# Altium PCB rgbController.PcbDoc
Units mil, origin at the board's own origin, x right, y up, seen from the top; angles counter-clockwise.
Board outline 3200 x 2470 mil, 2 copper layers (Top Layer, Bottom Layer); 44 components, 40 nets, 134 pads, 11 vias.
Unrouted connection lines stored in the file: 2.
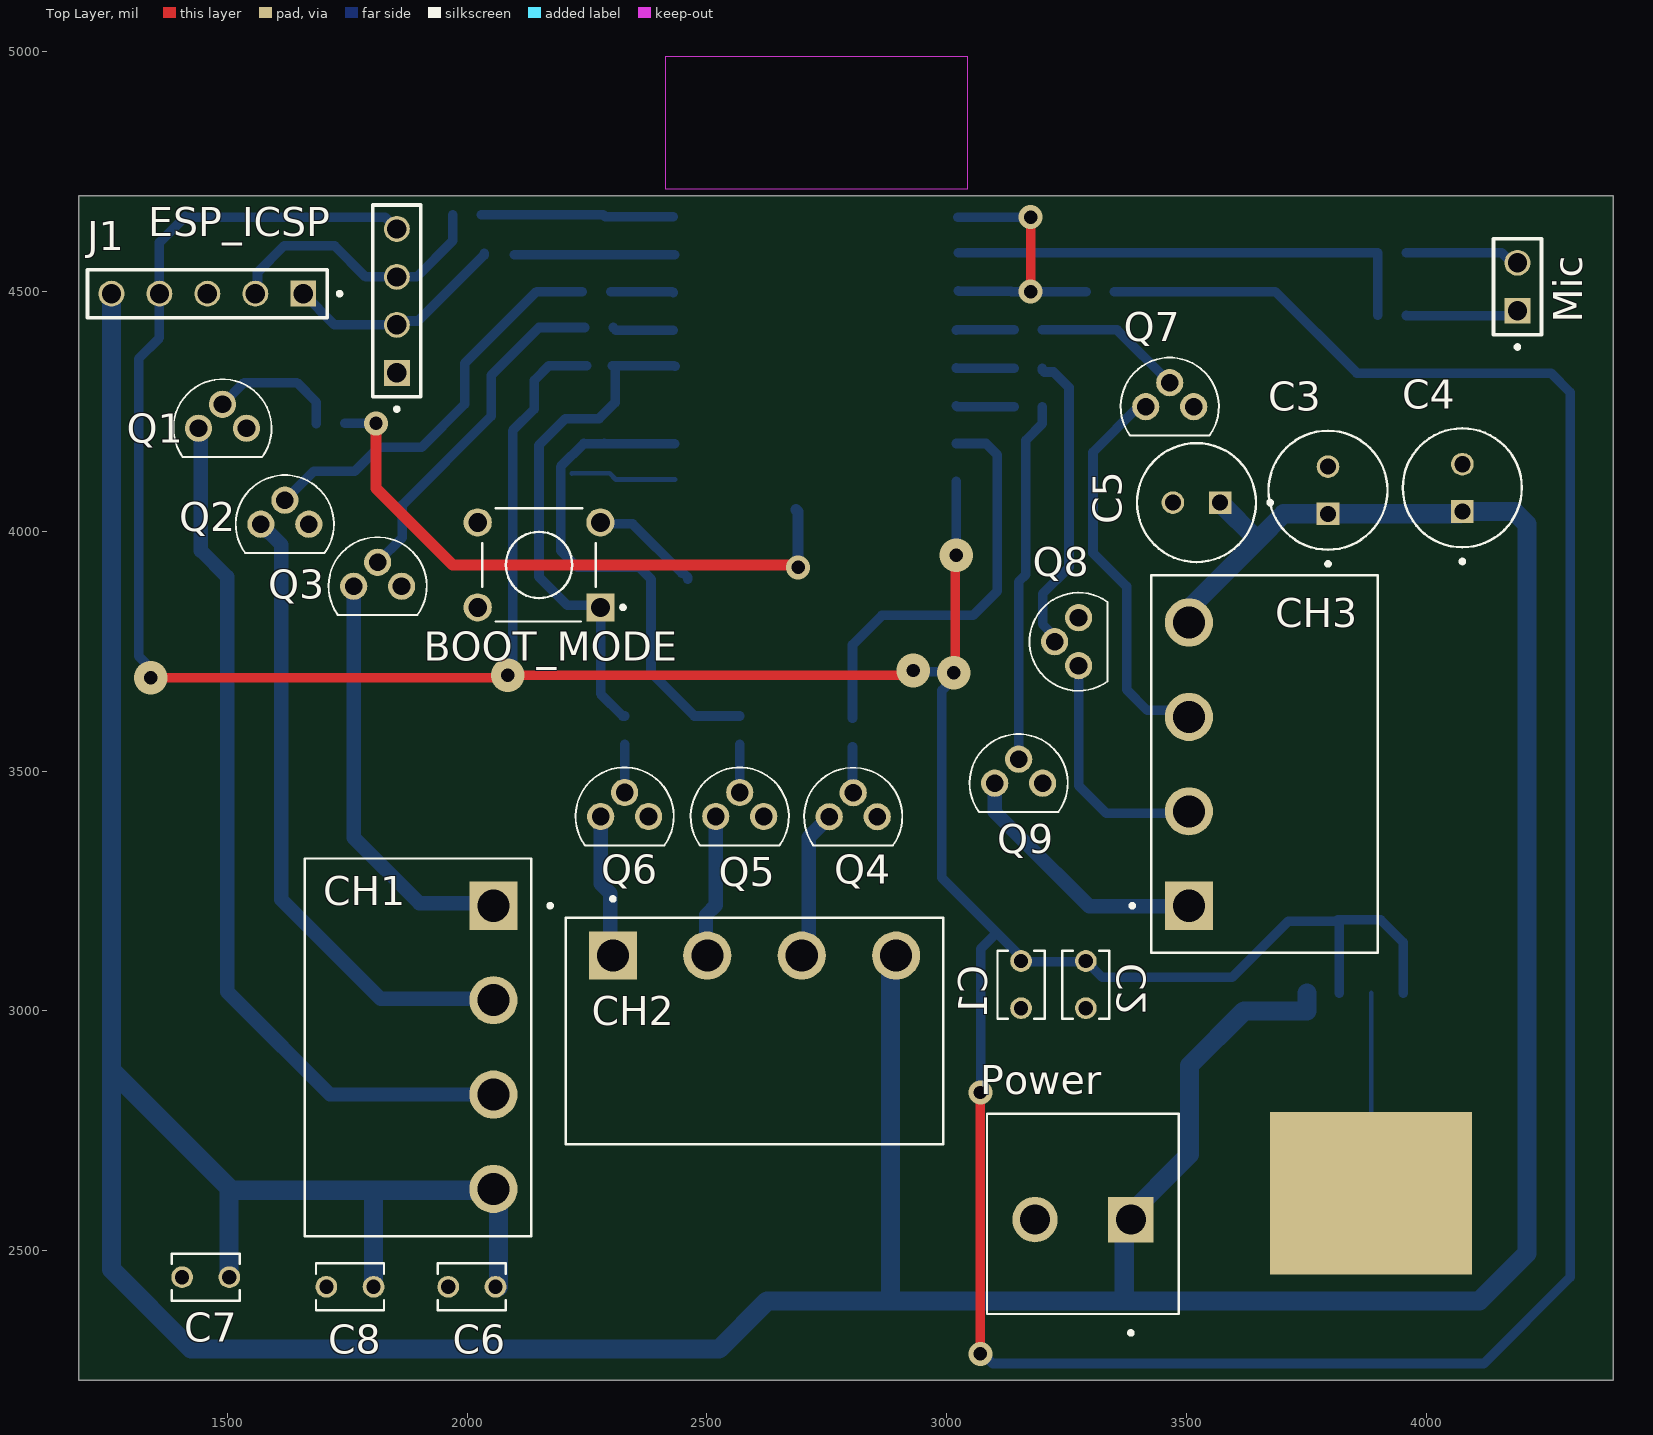
[diagram p0: Top Layer view]
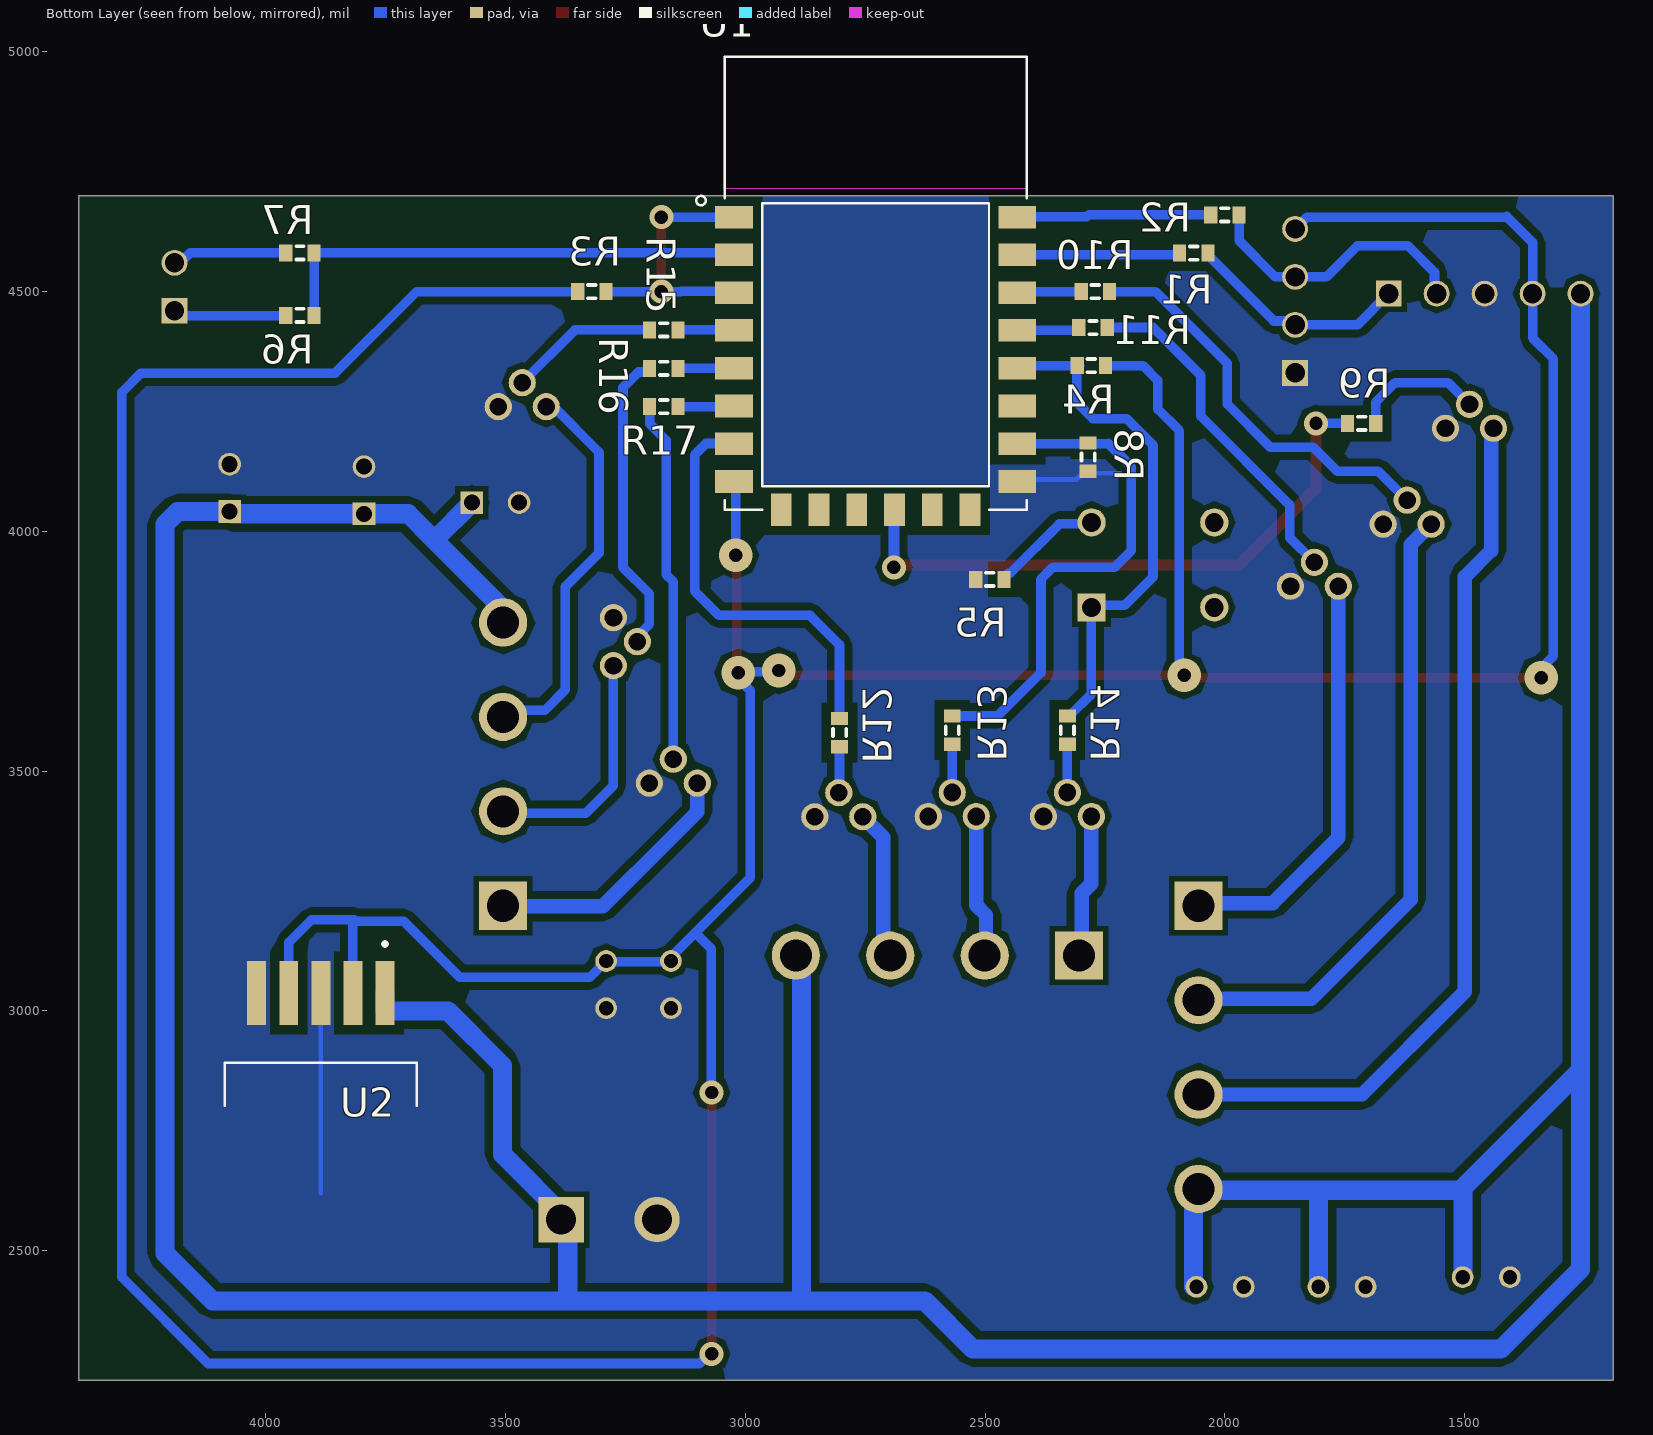
[diagram p1: Bottom Layer view, seen from below]
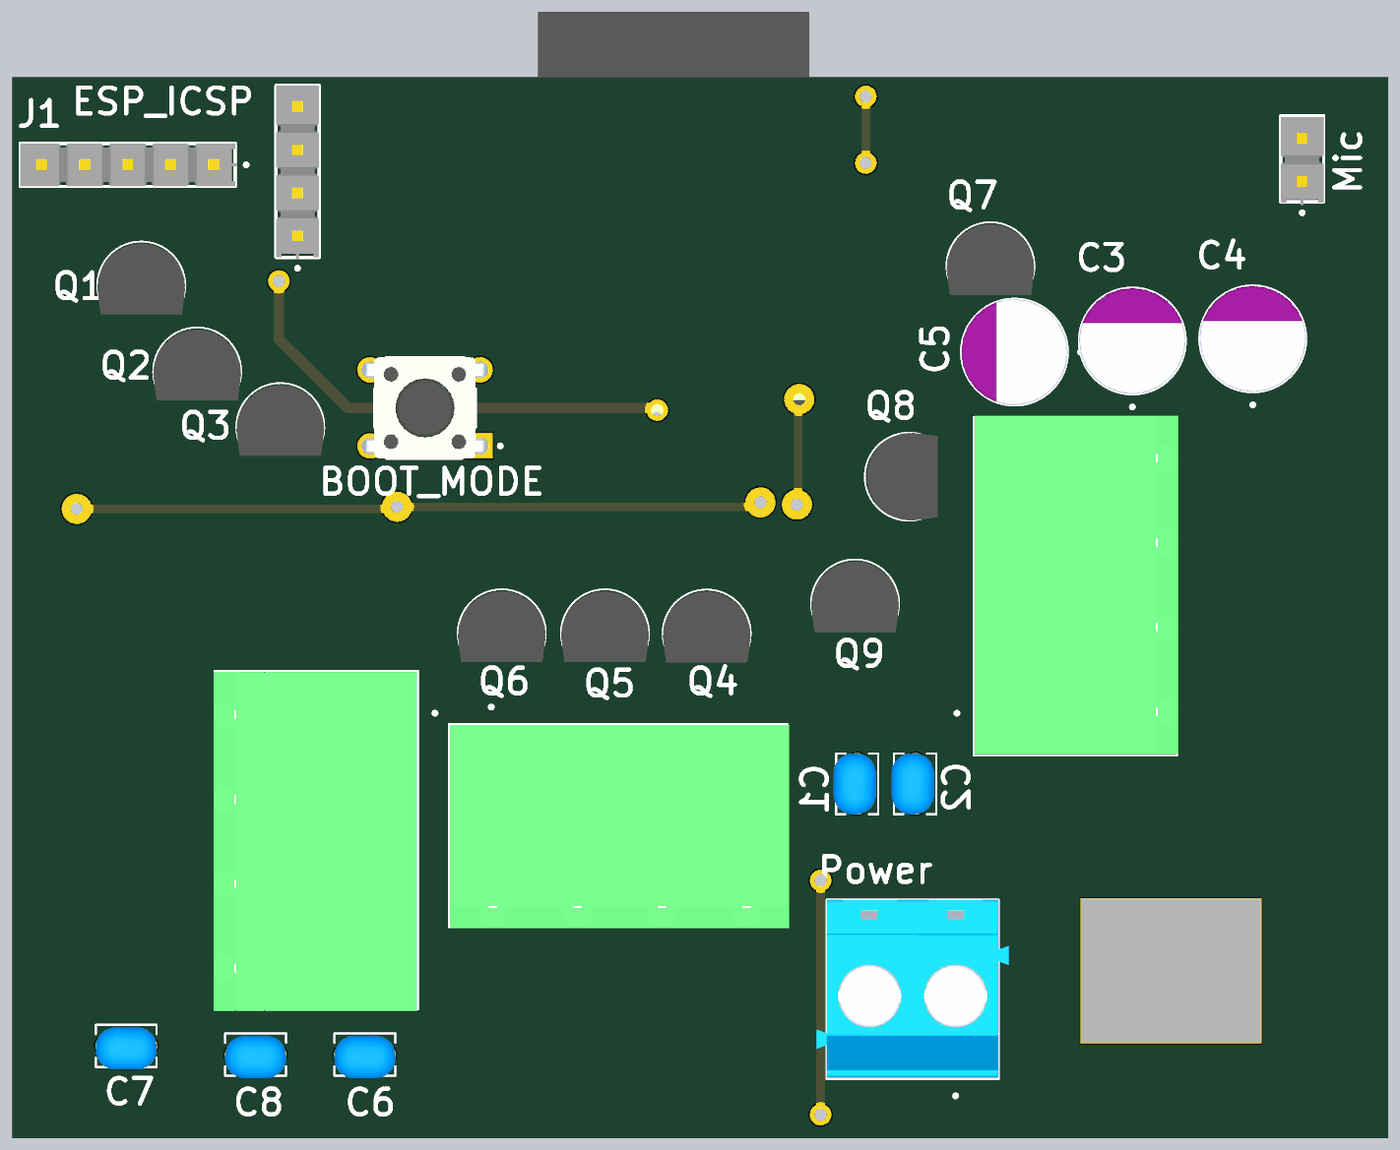
[diagram p2: 3D render of the assembled board from above, using the file's embedded part models]

## Layer stack, top to bottom
Top Solder: solder mask 0.4, Solder Resist, Dk 3.5
Top Layer: signal copper 1.4
Dielectric 1: dielectric 12.6, FR-4, Dk 4.8
Bottom Layer: signal copper 1.4
Bottom Solder: solder mask 0.4, Solder Resist, Dk 3.5

## Board outline
1190,2230 4390,2230 4390,4700 1190,4700

## Design rules (kind name [scope] priority, off if disabled: settings)
Clearance [All] p1: gap=12 ignorepadtopadclearanceinfootprint=FALSE except(15: Arc-Fill Arc-Poly Arc-Region Track-Fill Track-Poly Track-Region; 20: Arc-Arc Arc-Track Track-Track SMDPad-Fill SMDPad-Poly SMDPad-Region)
PlaneClearance [All] p1: clearance=40
PlaneConnect [All] p1: planeconnectstyle=Direct reliefexpansion=20 reliefentries=4 reliefconductorwidth=10 reliefairgap=10
PolygonConnect [All] p1: connectstyle=Direct reliefconductorwidth=10 reliefentries=4 polygonreliefangle="90 Angle" airgapwidth=10
RoomDefinition rgbController [InComponentClass('rgbController')] p1: confinementstyle=ConfineIn formatcopy=TRUE lockcomponents=FALSE outline 0,0 2000,0 2000,1000 0,1000
RoutingVias [All] p1: holewidth=28 width=50 viastyle="Through Hole" minholewidth=28 minwidth=50 maxholewidth=28 maxwidth=50
SolderMaskExpansion [All] p1: expansion=4 istentingtop=FALSE
Width [All] p1: maxlimit=10 minlimit=10 preferedwidth=10
28 further rules are at their usual default settings.

## Components (designator, comment, footprint, x,y, rotation, side; value= is the part's Value field where it differs from the comment)
BOOT_MODE "1825910-6" SW_1825910-6-4 2150,3930 r180 top
C1 "100p" CAP_RCE5C1H101J0DBH03A 3155,3055 r270 top
C2 "100p" CAP_RCE5C1H101J0DBH03A 3290,3055 r270 top
C3 "100u" CAPPRD250W60D630H900 3795,4085.79 r90 top
C4 "33u" CAPPRD250W60D630H900 4075,4090.79 r90 top
C5 "10u" CAPPRD250W60D630H900 3520.79,4060 r180 top
C6 "100p" CAP_RCE5C1H101J0DBH03A 2010,2425 r0 top
C7 "100n" CAP_RCE5C1H101J0DBH03A 1455,2445 r0 top
C8 "33n" CAP_RCE5C1H101J0DBH03A 1755.79,2425 r0 top
CH1 "TBP04R1-500-04GR" CUI_TBP04R1-500-04GR 2055,3219.49 r270 top
CH2 "TBP04R1-500-04GR" CUI_TBP04R1-500-04GR 2303.98,3115.59 r0 top
CH3 "TBP04R1-500-04GR" CUI_TBP04R1-500-04GR 3505,3219.45 r90 top
ESP_ICSP "TSW-104-23-F-S" SAMTEC_TSW-104-23-F-S 1853.46,4330.59 r90 top
J1 "Debug" SAMTEC_TSW-105-23-F-S 1658.46,4495.59 r180 top
Mic "TSW-102-23-F-S" SAMTEC_TSW-102-23-F-S 4190,4460 r90 top
Power "TB009-508-02BE" CUI_TB009-508-02BE 3383.99,2565 r180 top
Q1 "BC517G" TO-92_(TO-226) 1440,4215 r180 top
Q2 "BC517G" TO-92_(TO-226) 1570,4015 r180 top
Q3 "BC517G" TO-92_(TO-226) 1763.46,3885.59 r180 top
Q4 "BC517G" TO-92_(TO-226) 2755,3405 r180 top
Q5 "BC517G" TO-92_(TO-226) 2518.46,3405.59 r180 top
Q6 "BC517G" TO-92_(TO-226) 2278.46,3405.59 r180 top
Q7 "BC517G" TO-92_(TO-226) 3415,4260 r180 top
Q8 "BC517G" TO-92_(TO-226) 3275,3720 r270 top
Q9 "BC517G" TO-92_(TO-226) 3100,3475 r180 top
R1 "Res3" J1-0603 2065,4580 r0 bottom value=1K
R2 "Res3" J1-0603 2000,4660 r180 bottom value=1K
R3 "Res3" J1-0603 3320,4500 r0 bottom value=1K
R4 "Res3" J1-0603 2278.46,4345.59 r180 bottom value=1K
R5 "Res3" J1-0603 2490,3900 r0 bottom value=1K
R6 "Res3" J1-0603 3928.46,4450.59 r180 bottom value=1K
R7 "Res3" J1-0603 3928.46,4580.59 r180 bottom value=1K
R8 "Res3" J1-0603 2285,4155 r270 bottom value=1K
R9 "Res3" J1-0603 1715,4225 r180 bottom value=1K
R10 "Res3" J1-0603 2270,4500 r180 bottom value=1K
R11 "Res3" J1-0603 2275,4425 r180 bottom value=1K
R12 "Res3" J1-0603 2803.46,3580.59 r270 bottom value=1K
R13 "Res3" J1-0603 2568.46,3585.59 r270 bottom value=1K
R14 "Res3" J1-0603 2328.46,3585.59 r270 bottom value=1K
R15 "Res3" J1-0603 3170,4420 r0 bottom value=1K
R16 "Res3" J1-0603 3170,4340 r0 bottom value=1K
R17 "Res3" J1-0603 3170,4260 r0 bottom value=1K
U1 "ESP8266-12E/ESP-12E" XCVR_ESP8266-12E/ESP-12E 2728.15,4379.65 r180 bottom
U2 "LM2576HVS-12/NOPB" VREG_TPS79625KTTR 3885,2620 r270 bottom

## Footprints (in the part's own frame and the unit in brackets; to place one, negate y for a bottom-side part, rotate by r counter-clockwise, add the part's x,y. Pads: shape width x height; smd on the part's side, far side on the other; paste and mask are expansions set on the pad)
CAP_RCE5C1H101J0DBH03A [mm]
  round 1.15 hole 0.75: 1(-1.25,0) 2(1.25,0)
  silkscreen extent -1.8,-1.25 1.8,1.25, body extent -1.8,-1.4 1.8,1.1, height 5
CAPPRD250W60D630H900 [mm]
  rect 1.2x1.2 hole 0.85: 1(-1.25,0)
  round 1.2 hole 0.85: 2(1.25,0)
  silkscreen extent -4,-3.15 3.15,3.15, body extent -3.15,-3.15 3.15,3.15, height 9
CUI_TB009-508-02BE [mm]
  rect 2.4x2.4 / inner round 2.4 / far side rect 2.4x2.4 hole 1.6: 1(0,0)
  round 2.4 hole 1.6: 2(5.08,0)
  silkscreen extent -2.54,-5.6 7.62,6.1, body extent -3.14,-5.6 8.22,4.9, height 19.5
CUI_TBP04R1-500-04GR [mm]
  rect 2.55x2.55 / inner round 2.55 / far side rect 2.55x2.55 hole 1.7: 1(0,0)
  round 2.55 hole 1.7: 2(5,0) 3(10,0) 4(15,0)
  silkscreen extent -2.5,-10 17.5,3.1, body extent -2.41,-10.06 17.59,1.94, height 8.52
J1-0603 [mm] "Chip Resistor, Body 1.6x0.8mm, IPC High Density"
  rect 0.7x0.9 smd: 1(-0.75,0) 2(0.75,0)
  silkscreen extent -0.2,-0.35 0.2,0.35, body extent -0.85,-0.48 0.85,0.48, height 0.9
SAMTEC_TSW-102-23-F-S [mm]
  rect 1.37x1.37 hole 1.02: 01(0,0)
  round 1.37 hole 1.02: 02(2.54,0)
  silkscreen extent -2.02,-1.27 3.81,1.27, body extent -1.46,-1.27 3.75,1.27, height 8.38
SAMTEC_TSW-104-23-F-S [mm]
  rect 1.37x1.37 / inner round 1.37 / far side rect 1.37x1.37 hole 1.02: 01(0,0)
  round 1.37 hole 1.02: 02(2.54,0) 03(5.08,0) 04(7.62,0)
  silkscreen extent -2.02,-1.27 8.89,1.27, body extent -1.4,-1.27 8.89,1.27, height 8.38
SAMTEC_TSW-105-23-F-S [mm]
  rect 1.37x1.37 hole 1.02: 01(0,0)
  round 1.37 hole 1.02: 02(2.54,0) 03(5.08,0) 04(7.62,0) 05(10.16,0)
  silkscreen extent -2.02,-1.27 11.43,1.27, body extent -1.4,-1.27 11.43,1.27, height 8.38
SW_1825910-6-4 [mm]
  rect 1.498x1.498 / inner round 1.498 / far side rect 1.498x1.498 hole 0.99: 1(-3.25,2.25)
  round 1.498 hole 0.99: 2(3.25,2.25) 3(-3.25,-2.25) 4(3.25,-2.25)
  silkscreen extent -4.54,-3 3,3, body extent -3.9,-2.99 3.9,3, height 5.01
TO-92_(TO-226) [mm]
  round 1.44 hole 0.94: 1(0,0) 2(-1.27,-1.27) 3(-2.54,0)
  silkscreen extent -3.87,-2.6 1.33,1.53, body extent -3.87,-2.48 1.33,1.71, height 7.24
VREG_TPS79625KTTR [mm]
  rect 3.4x1 smd paste-0.05 mask+0.07: 1(-10.6,3.4) 2(-10.6,1.7) 3(-10.6,0) 4(-10.6,-1.7) 5(-10.6,-3.4)
  rect 8.6x10.7 smd far side paste-0.05 mask+0.07: 6(0,0)
  silkscreen extent -13.3,-5.08 -4.62,5.08, body extent -10.86,-5.08 3.49,5.08, height 4.65
XCVR_ESP8266-12E/ESP-12E [mm]
  rect 2x1.2 smd: 1(-7.5,7) 2(-7.5,5) 3(-7.5,3) 4(-7.5,1) 5(-7.5,-1) 6(-7.5,-3) 7(-7.5,-5) 8(-7.5,-7) 15(7.5,-7) 16(7.5,-5) 17(7.5,-3) 18(7.5,-1) 19(7.5,1) 20(7.5,3) 21(7.5,5) 22(7.5,7)
  rect 1.1x1.7 smd: 9(-5,-8.5) 10(-3,-8.5) 11(-1,-8.5) 12(1,-8.5) 13(3,-8.5) 14(5,-8.5)
  Keep-Out Layer region: 8,8.51 -8.009,8.51 -8.009,15.5 8,15.5
  Keep-Out Layer region: 8,8.51 -8.009,8.51 -8.009,15.5 8,15.5
  silkscreen extent -9.5,-8.5 8,15.5, body extent -8,-12 8,12, height 3

## Part data
BOOT_MODE: "Switch Push Button OFF (ON) SPST Round Button 0.05A 24VDC Momentary Contact PC Pins Thru-Hole", Package=None, Check_prices=https://www.snapeda.com/parts/1825910-6/TE+Connectivity+ALCOSWITCH+Switches/view-part/?ref=eda, Digi-Key_Part_Number=450-1650-ND, MF="TE Connectivity", MP=1825910-6, Purchase-URL=https://pricing.snapeda.com/search/part/1825910-6/?ref=eda, SnapEDA_Link=https://www.snapeda.com/parts/1825910-6/TE+Connectivity+ALCOSWITCH+Switches/view-part/?ref=snap
C1 C2 C6 C7 C8: library part RCE5C1H101J0DBH03A, "Lead Capacitor C0G(EIA) with Capacitance: 100pF and Rated Voltage: 50Vdc", Package="Radial Murata", Availability=Unavailable, MF=Murata, MP=RCE5C1H101J0DBH03A, Price=None, SnapEDA_Link=https://www.snapeda.com/parts/RCE5C1H101J0DBH03A/Murata/view-part/4545991/?ref=snap
C3 C4 C5: library part 16SEPC100MW+C3, "Conductive Polymer Aluminum Solid Capacitors, SEPC Series, 100uF , -55 +105C, 16V, radial lead type (6.3 x 9mm)", Package="RADIAL-2 Panasonic", Availability="Not in stock", Check_prices=https://www.snapeda.com/parts/16SEPC100MW+C3/Panasonic/view-part/?ref=eda, MF=Panasonic, MP=16SEPC100MW+C3, Price=None, SnapEDA_Link=https://www.snapeda.com/parts/16SEPC100MW+C3/Panasonic/view-part/?ref=snap
CH1 CH2 CH3: "Terminal Block", Package=None, Availability=Unavailable, MP=TBP04R1-500-04GR, Price=None
ESP_ICSP: "Connector Header Through Hole 4 position 0.100 (2.54mm)", Package=None, Availability="In Stock", Check_prices=https://www.snapeda.com/parts/TSW-104-23-F-S/Samtec/view-part/?ref=eda, MF=Samtec, MP=TSW-104-23-F-S, Price=None, Purchase-URL=https://pricing.snapeda.com/search/part/TSW-104-23-F-S/?ref=eda, SnapEDA_Link=https://www.snapeda.com/parts/TSW-104-23-F-S/Samtec/view-part/?ref=snap
J1: library part TSW-105-23-F-S, "Connector Header Through Hole 5 position 0.100 (2.54mm)", Package=None, Check_prices=https://www.snapeda.com/parts/TSW-105-23-F-S/Samtec/view-part/?ref=eda, Digi-Key_Part_Number=TSW-105-23-F-S-ND, MF=Samtec, MP=TSW-105-23-F-S, Purchase-URL=https://pricing.snapeda.com/search/part/TSW-105-23-F-S/?ref=eda, SnapEDA_Link=https://www.snapeda.com/parts/TSW-105-23-F-S/Samtec/view-part/?ref=snap
Mic: Package=None, Availability=Unavailable, MP=TSW-102-23-F-S, Price=None
Power: "2~24 Poles, Screw Type, Horizontal, 5.08 Pitch, 26~12 (AWG), Terminal Block Connector", Package=None, Availability="In Stock", Check_prices=https://www.snapeda.com/parts/TB009-508-02BE/CUI+Devices/view-part/?ref=eda, CUI_purchase_URL=https://www.cuidevices.com/product/interconnect/connectors/terminal-blocks/tb009-508-series?utm_source=snapeda.com&utm_medium=referral&utm_campaign=snapedaBOM, MF="CUI Devices", MP=TB009-508-02BE, Price=None, Purchase-URL=https://pricing.snapeda.com/search/part/TB009-508-02BE/?ref=eda, SnapEDA_Link=https://www.snapeda.com/parts/TB009-508-02BE/CUI+Devices/view-part/?ref=snap
Q1 Q2 Q3 Q4 Q5 Q6 Q7 Q8 Q9: "Transistor BJT NPN", Manufacturer_Name=onsemi, Mouser Part Number=863-BC517G, Datasheet Link=https://datasheet.datasheetarchive.com/originals/distributors/Datasheets-24/DSA-461072.pdf, Manufacturer_Part_Number=BC517G, Mouser Price/Stock=https://www.mouser.com/Search/Refine.aspx?Keyword=863-BC517G
R1 R2 R3 R4 R5 R6 R7 R8 R9 R10 R11 R12 R13 R14 R15 R16 R17: "Resistor", LatestRevisionDate=29-May-2009, LatestRevisionNote="IPC-7351 Footprint Added.", PackageDescription="Chip Resistor", PackageReference=J1-0603, Published=8-Jun-2000, Publisher="Altium Limited"
U1: "This WiFi module has a 32-bit MCU micro and clock speeds supporting 80 MHz or 160 MHz. Supports the RTOS and integrated Wi-Fi MAC/BB/RF/PA/LNA, and has an on-board antenna.", Package=None, Availability="Not in stock", Check_prices=https://www.snapeda.com/parts/ESP8266-12E/ESP-12E/AI-Thinker/view-part/?ref=eda, MF=AI-Thinker, MP=ESP8266-12E/ESP-12E, Price=None, SnapEDA_Link=https://www.snapeda.com/parts/ESP8266-12E/ESP-12E/AI-Thinker/view-part/?ref=snap
U2: "SIMPLE SWITCHER&reg; 4V to 60V, 3A Low Component Count Step-Down Regulator 5-DDPAK/TO-263 -40 to 125", Package="TO-263-5 Texas Instruments", Availability="In Stock", Check_prices=https://www.snapeda.com/parts/LM2576HVS-12/Texas+Instruments/view-part/?ref=eda, MF="Texas Instruments", MP=LM2576HVS-12, Price=None, Purchase-URL=https://pricing.snapeda.com/search/part/LM2576HVS-12/?ref=eda, SnapEDA_Link=https://www.snapeda.com/parts/LM2576HVS-12/Texas+Instruments/view-part/?ref=snap

## Via types
v1: diameter 50, hole 28, Top Layer to Bottom Layer, 6 vias
v2: diameter 70, hole 28, Top Layer to Bottom Layer, 5 vias

## Nets (pads, with @x,y where several pads share a name; then routed paths per layer and width w, separated by ;. In a path a pad name is that pad's centre, name@x,y a point inside that pad or via, vN(x,y) a via of type N, cw(c..) or ccw(c..) an arc to the next point about the centre after c; other vN are vias at no path point)
12V: C3.1 C4.1 C5.1 C6.2 C7.2 C8.2 CH1.4 CH2.4 CH3.4 J1.05 Power.1 U2.1 | length 10703.9
  Bottom Layer w40: J1.05 1258.46,2876.54 ; C7.2 1503.71,2445.5 1503.71,2621.07 1508.82,2626.18 ; C8.2 1805,2626.18 ; C6.2@2065.17,2425 2065.17,2616.01 2055,2626.18 1805,2626.18 ; CH2.4@2897.28,3115.59 2882.5,3100.81 2882.5,2395.39 ; CH3.4@3475,3808.7 3648.94,3982.64 ; C5.1 3647.36,3982.64 3648.94,3982.64 ; U2.1 3751.14,3000.31 3750.83,3000 3620,3000 3505.95,2885.95 3505.95,2700.95 3370,2565 3370,2395.39 ; 1258.46,2876.54 1258.46,2461.54 1425,2295 2525,2295 2625.39,2395.39 2882.5,2395.39 ; 1258.46,2876.54 1508.82,2626.18 ; 1508.82,2626.18 1805,2626.18 ; 2882.5,2395.39 3370,2395.39 ; 3370,2395.39 4110.39,2395.39 4210,2495 4210,4015 4183.43,4041.57 C4.1 4070,4036.57 C3.1 3702.87,4036.57 3648.94,3982.64
ESP_RX: J1.01 | length 468.1
  Bottom Layer w20: J1.01 1723.46,4430.59 1853.46,4430.59 1861.46,4438.58 1897.99,4438.58 2035.47,4576.06 2035.47,4580
ESP_TX: ESP_ICSP.03 J1.02 R2.2 | length 589
  Bottom Layer w20: J1.02 1562.99,4500.12 1562.99,4540.12 1618.46,4595.59 1723.46,4595.59 1788.46,4530.59 ESP_ICSP.03 1895,4530.59 1970.47,4606.06 R2.2
GND: C1.2 C2.2 C3.2 C4.2 C5.2 C6.1 C7.1 C8.1 ESP_ICSP.01 J1.03 Power.2 Q1.3 Q2.3 Q3.3 Q4.3 Q5.3 Q6.3 Q7.3 Q8.3 Q9.3 R5.2 R8.2 U1.15 U2.3 U2.5 U2.6 | length 638.3
  Bottom Layer w10: 2217.99,4120.59 2218.46,4121.06 2297.4,4121.06 2310.31,4108.15 U1.15@2433.46,4108.15 ; 3885,2620 U2.3
NetBOOT_MODE_3: BOOT_MODE.3 R5.1 | length 232.2
  Bottom Layer w20: BOOT_MODE.3@2278.46,4015.59 2344.88,4015.59 2447.76,3912.72 2451.69,3912.72 2460.47,3903.94 R5.1
NetCH1_1: CH1.1 Q3.1 | length 872.1
  Bottom Layer w30: Q3.1 1763.46,3361.54 1900,3225 CH1.1@2055,3225
NetCH1_2: CH1.2 Q2.1 | length 1328.4
  Bottom Layer w30: Q2.1 1612.5,3972.5 1612.5,3232.5 1819.61,3025.39 CH1.2@2055,3025.39
NetCH1_3: CH1.3 Q1.1 | length 1843.6
  Bottom Layer w30: Q1.1 1445,4210 1445,3960 1500,3905 1500,3040 1520,3020 1714.21,2825.79 CH1.3
NetCH2_1: CH2.1 Q6.1 | length 298.3
  Bottom Layer w30: Q6.1 2278.46,3265.59 2298.46,3245.59 CH2.1@2298.46,3115.59
NetCH2_2: CH2.2 Q5.1 | length 298.4
  Bottom Layer w30: CH2.2@2498.07,3115.59 2498.07,3200.2 2518.46,3220.59 Q5.1
NetCH2_3: CH2.3 Q4.1 | length 313.2
  Bottom Layer w30: CH2.3 2712.36,3130.28 2712.36,3199.49 2712.36,3362.36 Q4.1
NetCH3_1: CH3.1 Q9.1 | length 516.5
  Bottom Layer w30: Q9.1 3100,3415 3155.86,3359.14 3296.85,3218.15 CH3.1@3475,3218.15
NetCH3_2: CH3.2 Q8.1 | length 474.9
  Bottom Layer w20: Q8.1 3275,3655 3275,3470 3332.5,3412.5 3472.5,3412.5 CH3.2@3475,3415
NetCH3_3: CH3.3 Q7.1 | length 797.4
  Bottom Layer w20: Q7.1 3400,4260 3305,4165 3305,3955 3375,3885 3375,3670 3417.97,3627.03 3459.82,3627.03 CH3.3@3475,3611.85
NetESP_ICSP_02: ESP_ICSP.02 R1.1
NetMic_01: Mic.01 R6.1 | length 236.4
  Bottom Layer w20: R6.1 3958.58,4450 4180,4450 Mic.01
NetMic_02: Mic.02 R7.1 | length 240.5
  Bottom Layer w20: R7.1 4070.19,4580.59 4157.52,4580.59 4178.11,4560 Mic.02
NetQ1_2: Q1.2 R9.2 | length 275.4
  Bottom Layer w20: Q1.2 1535,4310 1645,4310 1685.47,4269.53 R9.2
NetQ2_2: Q2.2 R10.2 | length 850.4
  Bottom Layer w20: Q2.2 1680,4125 1765.59,4125 1815.59,4175 1905,4175 1995,4265 1995,4350 2145,4500 R10.2
NetQ3_2: Q3.2 R11.2 | length 724.3
  Bottom Layer w20: Q3.2 1865,3987.13 1865,4055 2050,4240 2050,4325 2150,4425 R11.2
NetQ4_2: Q4.2 R12.2 | length 95.5
  Bottom Layer w20: Q4.2@2803.46,3455.59 R12.2
NetQ5_2: Q5.2 R13.2 | length 100.5
  Bottom Layer w20: Q5.2 R13.2
NetQ6_2: Q6.2 R14.2 | length 100.5
  Bottom Layer w20: Q6.2 R14.2
NetQ7_2: Q7.2 R15.2 | length 311
  Bottom Layer w20: R15.2 3355,4420 Q7.2
NetQ8_2: Q8.2 R16.2 | length 637.5
  Bottom Layer w20: R16.2 3199.53,4336.06 3203.31,4332.28 3222.72,4332.28 3255,4300 3255,3925 3200,3870 3200,3806.3 3225,3781.3 Q8.2
NetQ9_2: Q9.2 R17.2 | length 755.5
  Bottom Layer w20: Q9.2 3150,3895 3165,3910 3165,4190 3199.53,4224.53 R17.2
NetR1_2: R1.2 U1.21 | length 334.8
  Bottom Layer w20: R1.2@2098.03,4576.5 U1.21
NetR2_1: R2.1 U1.22 | length 402
  Bottom Layer w20: R2.1 2283.58,4660 2287.99,4655.59 U1.22@2429.72,4655.59
NetR3_1: R3.1 U1.1 U1.3 | length 572.7
  Top Layer w20: v1(3175,4500) v1(3175,4655)
  Bottom Layer w20: U1.1 v1@3174.76,4655.24 ; U1.3@3024.02,4501.85 3025.28,4500.59 3133.94,4500.59 ; 3134.53,4500 v1(3175,4500) R3.1
NetR4_1: R4.1 R14.1 U1.18 | length 1087
  Bottom Layer w20: R14.1 2324.53,3615.12 2278.46,3661.18 2278.46,3845.59 2209.41,3845.59 2150,3905 2150,4180 2205,4235 2275,4235 2308.46,4268.46 2308.46,4340.12 2302.99,4345.59 2432.24,4345.59 U1.18@2433.46,4344.37
NetR6_2: R6.2 R7.2 U1.2 | length 1004.9
  Bottom Layer w20: U1.2@3024.02,4580.59 3298.94,4580.59 3588.94,4580.59 R7.2 R6.2
NetR8_1: R8.1 R13.1 U1.16 | length 1063.8
  Bottom Layer w20: 2243.5,4183.5 2195,4135 2195,3960 2229.41,3925.59 2358.46,3925.59 2383.46,3900.59 2383.46,3705.59 2473.94,3615.12 R13.1 ; 2244.21,4182.8 R8.1@2286.73,4182.8 ; R8.1@2286.02,4183.5 R8.1@2286.73,4182.8 ; U1.16 R8.1@2286.73,4182.8
NetR9_1: R9.1 U1.12 | length 1270.5
  Top Layer w23.62: v1(1810,4225) 1810,4090 1970,3930 2685,3930 v1(2690,3925)
  Bottom Layer w20: R9.1@1745,4225.59 v1@1810,4225.59
  Bottom Layer w23.62: U1.12@2685.63,4045.35 2690,4040.98 v1(2690,3925)
NetR10_1: R10.1 U1.20 | length 131
  Bottom Layer w20: R10.1 2427.83,4500 U1.20@2429.72,4498.11
NetR11_1: R11.1 U1.19 | length 127.5
  Bottom Layer w20: R11.1 2310.16,4419.37 U1.19@2429.72,4419.37
NetR12_1: R12.1 U1.7 | length 880.4
  Bottom Layer w20: R12.1 2803.46,3763.46 2865,3825 3055,3825 3105,3875 3105,4160 3081.85,4183.15 U1.7@3020.28,4183.15
NetR15_1: R15.1 U1.4 | length 120.5
  Bottom Layer w20: U1.4@3020.28,4419.37 3020.91,4420 R15.1
NetR16_1: R16.1 U1.5 | length 120.5
  Bottom Layer w20: U1.5@3020.28,4340.63 3020.91,4340 R16.1
NetR17_1: R17.1 U1.6 | length 121
  Bottom Layer w20: U1.6@3020.28,4261.89 3022.17,4260 R17.1
VCC: C1.1 C2.1 ESP_ICSP.04 J1.04 R3.2 R4.2 U1.8 U2.2 U2.4 | length 11151.3
  Top Layer w20: v2(1340,3695) 2080,3695 v2(2085,3700) v2@2900,3700 ; v2(3015,3705) 3017.64,3707.64 3017.64,3947.64 v2(3020.28,3950.28) ; v1(3070,2285) v1(3070,2830)
  Bottom Layer w20: v2(1340,3695) 1340,3715 1315,3740 1315,4360 1358.46,4403.46 J1.04 1358.46,4602.31 1412.61,4656.45 1413.94,4655.12 1828.94,4655.12 ESP_ICSP.04 ; v2@2095,3725.86 2095,4210 2140,4255 2140,4315 2170.59,4345.59 R4.2 ; v2(2930,3710) 2932.5,3707.5 3012.5,3707.5 v2(3015,3705) 3015,3693.28 2990,3668.28 2990,3277.48 3108.74,3158.74 ; v2(3020.28,3950.28) U1.8@3020.28,4104.41 ; v1(3070,2285) 3075.86,2285 3095.86,2265 4120,2265 4300,2445 4300,4290 4260,4330 3855,4330 3685,4500 R3.2 ; v1(3070,2830) 3071.24,2831.24 3071.24,3130 3099.98,3158.74 3108.74,3158.74 ; C2.1@3290,3102.3 3165.18,3102.3 3108.74,3158.74 ; C2.1 3324.21,3070 3595,3070 3711.93,3186.93 3818.07,3186.93 ; U2.2 3818.07,3186.93 ; U2.4 3951.93,3143.07 3905,3190 3815,3190 3818.07,3186.93
pads on no net: BOOT_MODE.1 BOOT_MODE.2 BOOT_MODE.4 U1.9 U1.10 U1.11 U1.13 U1.14 U1.17

## Polygon pours and split planes (outlines as drawn)
GND on Bottom Layer "GND_L02_P000" (solid, remove dead copper, pour order 0): 1190,4700 4390,4700 4390,2230 1190,2230